# Altium PCB CurrentShuntAmp2b.PcbDoc
Units mil, origin at the board's own origin, x right, y up, seen from the top; angles counter-clockwise.
Board outline 810 x 285 mil, 2 copper layers (Component Side, Bottom Layer), stack 12.8 mil thick; 5 components, 5 nets, 20 pads, 0 vias.
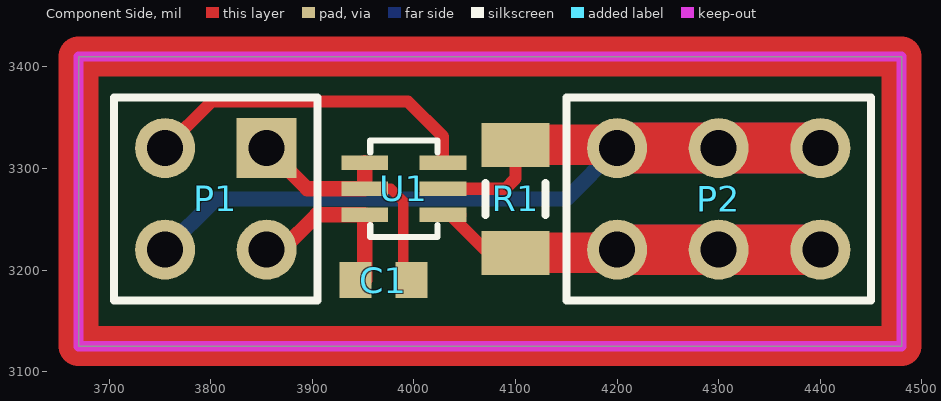
[diagram p0: Component Side view]
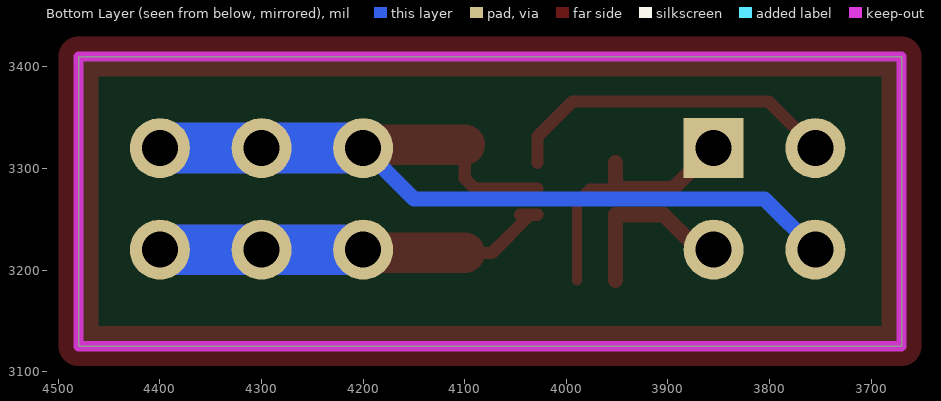
[diagram p1: Bottom Layer view, seen from below]
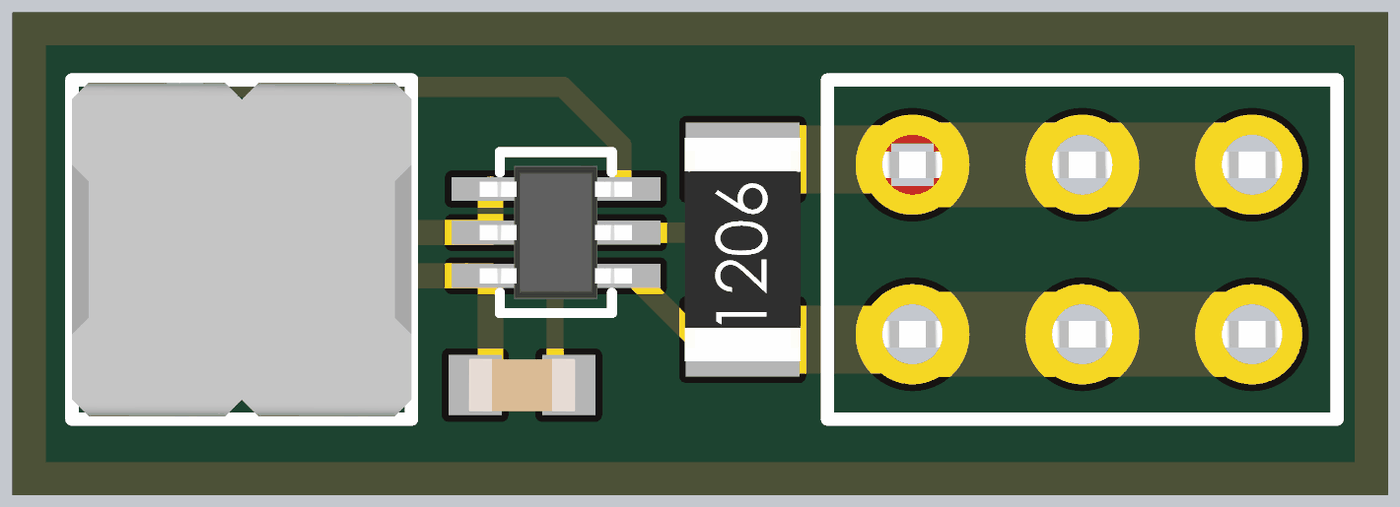
[diagram p2: 3D render of the assembled board from above, using the file's embedded part models]

## Layer stack, top to bottom
Top Solder: solder mask 0.4, Solder Resist, Dk 3.5
Component Side: signal copper 1.4
Dielectric 1: core 10, FR-4, Dk 4.2
Bottom Layer: signal copper 1.4
Solder Side: solder mask 0.4, Solder Resist, Dk 3.5

## Board outline
3670,3125 4480,3125 4480,3410 3670,3410

## Design rules (kind name [scope] priority, off if disabled: settings)
Clearance [All] p1: gap=10
PolygonConnect [All] p1: connectstyle=Direct reliefconductorwidth=10 reliefentries=4 polygonreliefangle="90 Angle" airgapwidth=10
RoutingVias [All] p1: holewidth=20 width=40 viastyle="Through Hole" minholewidth=20 minwidth=40 maxholewidth=20 maxwidth=40
SolderMaskExpansion [All] p1: expansion=4
Width [All] p1: maxlimit=50 minlimit=10 preferedwidth=10 minimp=50.000000 maximp=50.000000 favimp=50.000000
30 further rules are at their usual default settings.

## Components (designator, comment, footprint, x,y, rotation, side; value= is the part's Value field where it differs from the comment)
C1 "Cap" 1608[0603] 3970,3190 r0 top
P1 "Header 2X2" HDR2X2 3755,3320 r270 top
P2 "Header 3X2" HDR2X3 4200,3220 r0 top
R1 "Res1" C1206 4100,3270 r90 top
U1 "INA213AIDCKR" DCK6 3990,3280 r0 top

## Footprints (in the part's own frame and the unit in brackets; to place one, negate y for a bottom-side part, rotate by r counter-clockwise, add the part's x,y. Pads: shape width x height; smd on the part's side, far side on the other; paste and mask are expansions set on the pad)
1608[0603] [mm] "Chip Capacitor, Body 1.6x0.8mm, IPC High Density"
  rect 0.8x0.9 smd: 1(-0.7,0) 2(0.7,0)
  body extent -0.8,-0.4 0.8,0.4, height 0.78
C1206 [mm] "Chip Capacitor, Body 3.2x1.6mm, IPC High Density"
  rect 1.1x1.7 smd: 1(-1.35,0) 2(1.35,0)
  silkscreen extent -0.4,-0.75 0.4,0.75, body extent -1.67,-0.86 1.68,0.87, height 0.85
DCK6 [mil]
  rect 46x14 smd: 1(-38.5,25.59) 2(-38.5,0) 3(-38.5,-25.59) 4(38.5,-25.59) 5(38.5,0) 6(38.5,25.59)
  silkscreen extent -33,-48 33,48, body extent -45,-39 45,39, height 37
HDR2X2 [mm] "Connector; Header; 2x2 Position"
  round 1.5 hole 0.9: 1(0,0) 3(2.54,0) 4(2.54,2.54)
  rect 1.5x1.5 hole 0.9: 2(0,2.54)
  silkscreen extent -1.27,-1.27 3.81,3.81, body extent -1.23,-1.27 3.77,3.81, height 8.6
HDR2X3 [mm] "Connector; Header; 3x2 Position"
  round 1.5 hole 0.9: 1(0,0) 2(0,2.54) 3(2.54,0) 4(2.54,2.54) 5(5.08,0) 6(5.08,2.54)
  silkscreen extent -1.27,-1.27 6.35,3.81, body extent -1.39,-1.23 6.48,3.77, height 2.79

## Part data
C1: library part "Cap Semi", "Capacitor (Semiconductor SIM Model)"
P1: "Header, 2-Pin, Dual row"
P2: "Header, 3-Pin, Dual row"
R1: "Resistor"
U1: "Imported"

## Nets (pads, with @x,y where several pads share a name; then routed paths per layer and width w, separated by ;. In a path a pad name is that pad's centre, name@x,y a point inside that pad or via, vN(x,y) a via of type N, cw(c..) or ccw(c..) an arc to the next point about the centre after c; other vN are vias at no path point)
ADC: P1.1 U1.6 | length 332.8
  Component Side w12: P1.1 3801,3366 3994,3366 4028.5,3331.5 U1.6
GND: C1.2 P1.2 U1.1 U1.2 | length 259.4
  Component Side w10: U1.2 3977.12,3280 3989.5,3267.62 C1.2@3989.5,3190
  Component Side w15: P1.2 3895,3280 U1.2 U1.1
IN+: P2.1 P2.3 P2.5 R1.1 U1.4 | length 598.4
  Component Side w12: U1.4 U1.4@4045.59,3254.41 ; U1.4@4035.59,3254.41 4073.15,3216.85 R1.1
  Component Side w40: R1.1 4196.85,3216.85 P2.1
  Component Side w50: P2.1 P2.3 P2.5
  Bottom Layer w50: P2.1 P2.3 P2.5
IN-: P1.3 P2.2 P2.4 P2.6 R1.2 U1.5 | length 1096.5
  Component Side w12: U1.5 4090,3280 4100,3290 R1.2
  Component Side w40: R1.2 4196.85,3323.15 P2.2
  Component Side w50: P2.2 P2.4 P2.6
  Bottom Layer w15: P1.3 3805,3270 4150,3270 P2.2
  Bottom Layer w50: P2.2 P2.4 P2.6
VCC: C1.1 P1.4 U1.3 | length 175.2
  Component Side w15: P1.4 3870,3220 3904.41,3254.41 U1.3 C1.1@3951.5,3190
copper on no net: | length 2190
  Component Side w39.37: 3670,3125 4480,3125 4480,3410 3670,3410 3670,3125

## Keep-outs
Keep-Out Layer:
  the board outline again, w10